# Altium PCB hazi_kiindulas.PcbDoc
Units mm, origin at the board's own origin, x right, y up, seen from the top; angles counter-clockwise.
Board outline 90.17 x 58.42 mm, 2 copper layers (Top Layer, Bottom Layer); 29 components, 59 nets, 238 pads, 54 vias.
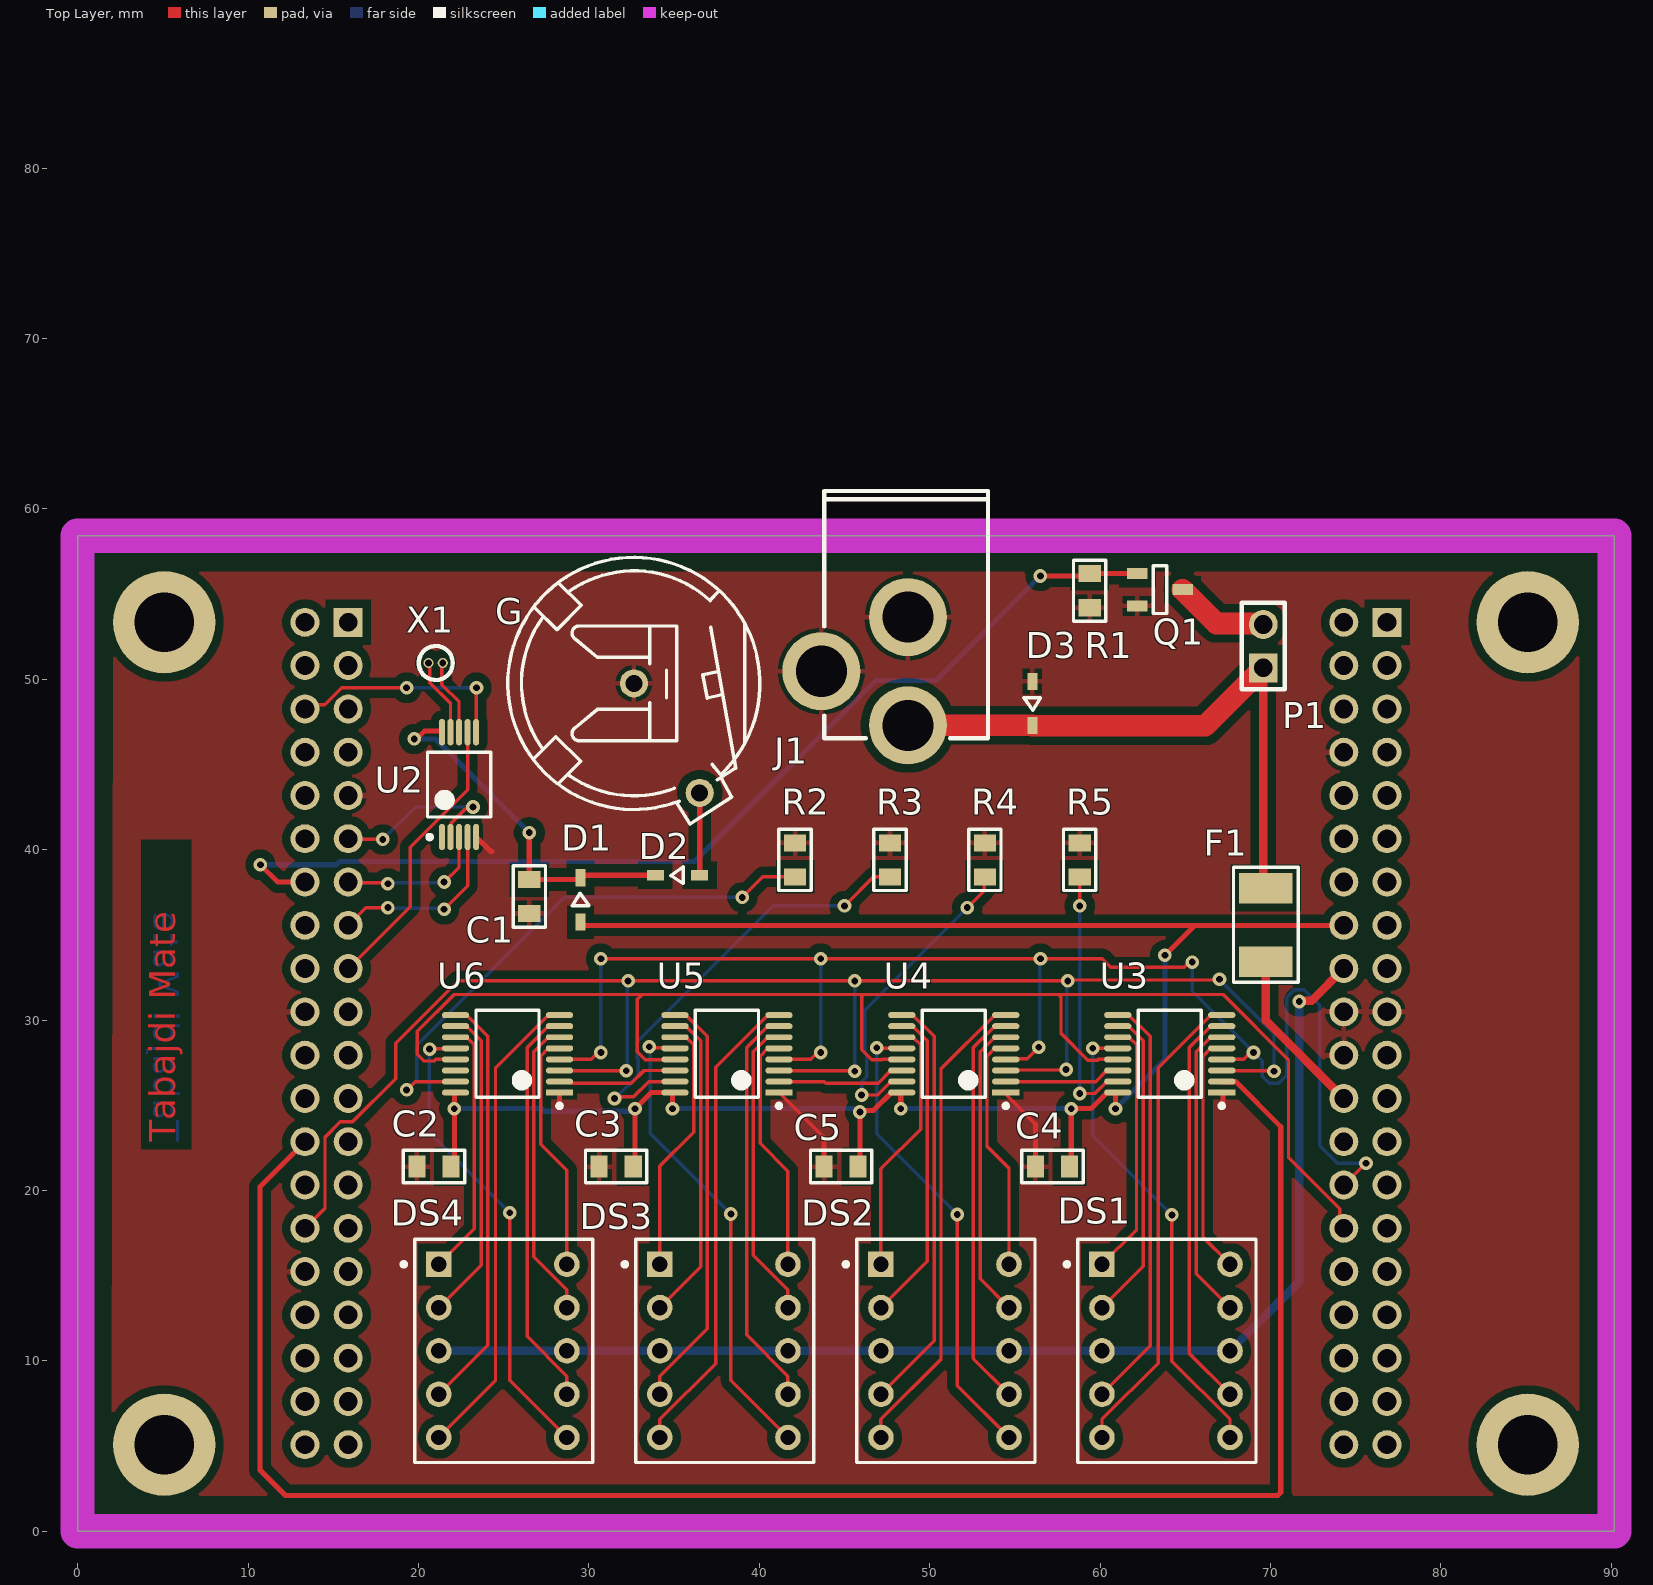
[diagram p0: Top Layer view]
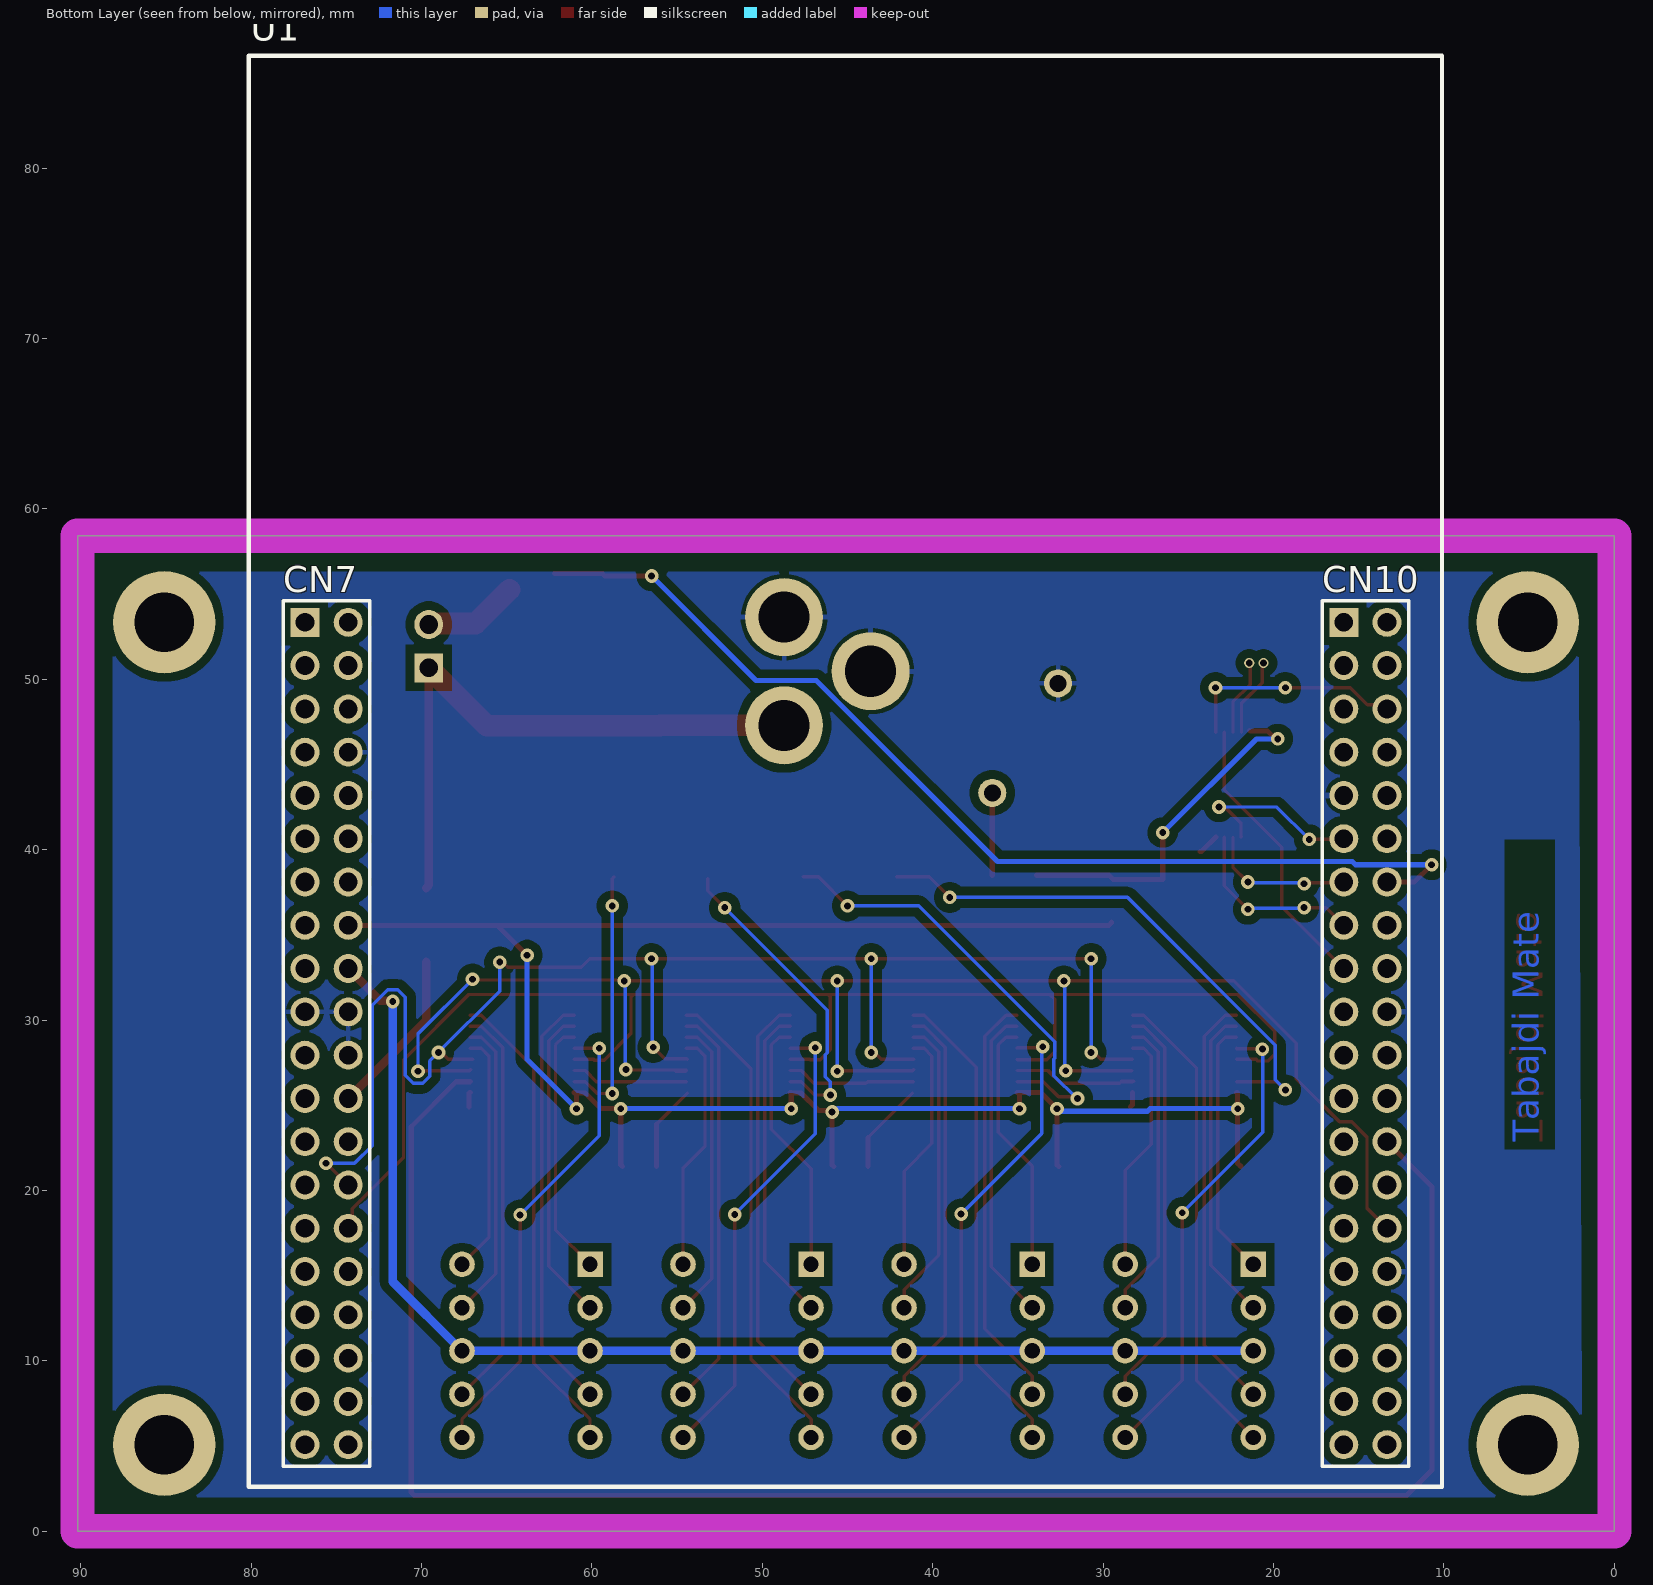
[diagram p1: Bottom Layer view, seen from below]

## Layer stack, top to bottom
Top Solder: solder mask 0.0102, Solder Resist, Dk 3.5
Top Layer: signal copper 0.0356
Dielectric 1: dielectric 0.32, FR-4, Dk 4.8
Bottom Layer: signal copper 0.0356
Bottom Solder: solder mask 0.0102, Solder Resist, Dk 3.5

## Board outline
0,0 90.17,0 90.17,58.42 0,58.42

## Design rules (kind name [scope] priority, off if disabled: settings)
BoardOutlineClearance [All] p1: gap=0.5 ignorepadtopadclearanceinfootprint=FALSE
Clearance [All] p1: gap=0.2 ignorepadtopadclearanceinfootprint=FALSE except(0.5: Arc-Fill Arc-Poly Arc-Region Track-Fill Track-Poly Track-Region SMDPad-Fill SMDPad-Poly SMDPad-Region THPad-Fill THPad-Poly THPad-Region Via-Fill Via-Poly Via-Region Fill-Fill Fill-Poly Fill-Region Poly-Poly Poly-Region Region-Region)
ComponentClearance [All] p1: gap=0.254 collisioncheckmode=3 verticalgap=0.2 showdistances=FALSE donotcheckwithout3dbody=TRUE
DiffPairsRouting [All] p1: maxlimit=0.25 minlimit=0.25 mostfreqgap=0.25 toplayer_minwidth=0.3 toplayer_maxwidth=0.38 toplayer_prefwidth=0.38 bottomlayer_minwidth=0.3 bottomlayer_maxwidth=0.38 bottomlayer_prefwidth=0.38 maxuncoupledlength=12.7
HoleSize [All] p1: absolutevalues=TRUE maxlimit=5 minlimit=0.4 maxpercent=80.000 minpercent=20.000
HoleToHoleClearance [All] p1: gap=0.25 allowstackedmicrovias=TRUE
MinimumAnnularRing [All] p1: minimumring=0.35
MinimumSolderMaskSliver [All] p1: minsoldermaskwidth=0.05
PlaneClearance [All] p1: clearance=0.5
PlaneConnect [All] p1: pad.planeconnectstyle=Relief pad.reliefexpansion=0.5 pad.reliefentries=4 pad.reliefconductorwidth=0.3 pad.reliefairgap=0.25 via.planeconnectstyle=Direct via.reliefexpansion=0.508 via.reliefentries=4 via.reliefconductorwidth=0.254 via.reliefairgap=0.254
PolygonConnect [All] p1: thpad.connectstyle=Relief thpad.reliefconductorwidth=0.3 thpad.reliefentries=4 thpad.polygonreliefangle="90 Angle" thpad.airgapwidth=0.25 smdpad.connectstyle=Relief smdpad.reliefconductorwidth=0.3 smdpad.reliefentries=4 smdpad.polygonreliefangle="90 Angle" smdpad.airgapwidth=0.25 via.connectstyle=Direct via.reliefconductorwidth=0.254 via.reliefentries=4 via.polygonreliefangle="90 Angle" via.airgapwidth=0.254
RoutingVias [All] p1: holewidth=0.4 width=0.8 viastyle="Through Hole" minholewidth=0.3 minwidth=0.7 maxholewidth=0.7 maxwidth=1.2
SilkToSilkClearance [All] p1: silktosilkclearance=0.1
SilkToSolderMaskClearance [IsPad] p1: minsilkscreentomaskgap=0.1 clearancetoexposedcopper=TRUE
SolderMaskExpansion [All] p1: expansion=0.1 istentingtop=FALSE
Width [All] p1: maxlimit=2.5 minlimit=0.2 preferedwidth=0.25
21 further rules are at their usual default settings.

## Classes and differential pairs
component class Display: C2 C3 C4 C5 DS3 DS4 R2 R3 R4 R5 U3 U4 U5 U6
component class Clock: C1 D1 D2 G U2 X1
component class Nucleo: D3 F1 J1 P1 Q1 R1 U1

## Components (designator, comment, footprint, x,y, rotation, side; value= is the part's Value field where it differs from the comment)
C1 "100nF" FP_0805_CAP_085 26.5,37.25 r90 top
C2 "100nF" FP_0805_CAP_085 20.904,21.4 r0 top
C3 "100nF" FP_0805_CAP_085 31.6,21.4 r0 top
C4 "100nF" FP_0805_CAP_085 57.2,21.4 r0 top
C5 "100nF" FP_0805_CAP_085 44.8,21.4 r0 top
D1 "SCHOTTKY" FP_SOD323-F 30.175,37.95 r180 top
D2 "SCHOTTKY" FP_SOD323-F 34.3,39.175 r270 top
D3 "12V" FP_SOD323-F 55.347,47.676 r0 top
DS1 "7SEG Red-CA" FP_7SEG 63.856,10.592 r0 top
DS2 "7SEG Red-CA" FP_7SEG 50.885,10.592 r0 top
DS3 "7SEG Red-CA" FP_7SEG 37.914,10.592 r0 top
DS4 "7SEG Red-CA" FP_7SEG 24.943,10.592 r0 top
F1 "Fuse (250mA)" FP_MULTIFUSE 69.723,37.744 r270 top
G "CH23-1220LF" CH23-1220LF 32.639,49.759 r90 top value=3V
J1 "2.xmm" FP_DC_TAP_ANYA 48.717,47.295 r0 top
P1 "Connector" FP_CONN2_TUSKE_254MM 69.571,50.673 r0 top
Q1 "NMOS" FP_SOT23-3 63.506,55.255 r180 top
R1 "100K" FP_0805_RES 59.385,55.194 r90 top
R2 "2K" FP_0805_RES 42.1,39.4 r270 top
R3 "2K" FP_0805_RES 47.667,39.4 r270 top
R4 "2K" FP_0805_RES 53.233,39.4 r270 top
R5 "2K" FP_0805_RES 58.8,39.4 r270 top
U1 "NUCLEO-F446RE" FP_NUCLEO-64_2x20 76.835,53.34 r180 bottom locked
U2 "RS5C348A-E2-F" TSSOP50P640X135-10M 22.377,43.815 r90 top
U3 "STP08CP05TTR" TSOP65P640X120-16M 64.084,28.016 r180 top
U4 "STP08CP05TTR" TSOP65P640X120-16M 51.41,28.016 r180 top
U5 "STP08CP05TTR" TSOP65P640X120-16M 38.1,28.016 r180 top
U6 "STP08CP05TTR" TSOP65P640X120-16M 25.222,28.016 r180 top
X1 "32.768KHz" "NXG 2X6 FOOTPRINT" 20.661,50.952 r0 top

## Footprints (in the part's own frame and the unit in brackets; to place one, negate y for a bottom-side part, rotate by r counter-clockwise, add the part's x,y. Pads: shape width x height; smd on the part's side, far side on the other; paste and mask are expansions set on the pad)
CH23-1220LF [mm]
  round 1.65 hole 1: NEG(0,0) POS(-6.425,-3.862)
  silkscreen extent -8.27,-7.39 7.4,7.4
FP_7SEG [mm] "LED, 7-Segment Display, 7.62 mm, RHD; 10 Leads; Row Space 5.08 mm; Pitch 2.54 mm"
  rect 1.5x1.5 hole 0.9: 1(-3.75,5.075)
  round 1.5 hole 0.9: 2(-3.75,2.535) 3(-3.75,-0.005) 4(-3.75,-2.545) 5(-3.75,-5.085) 6(3.765,-5.085) 7(3.765,-2.545) 8(3.765,-0.005) 9(3.765,2.535) 10(3.765,5.075)
  silkscreen extent -5.93,-6.56 5.29,6.54, body extent -5.16,-6.56 5.29,6.54, height 6.34
FP_0805_CAP_085 [mm] "0805 kapacitás YAGEO 0.85mm magas"
  rect 1x1.3 smd: 1(-1,0) 2(1,0)
  silkscreen extent -1.8,-0.95 1.8,0.95, body extent -1,-0.64 1.03,0.64, height 0.85
FP_0805_RES [mm] "0805 ellenállás"
  rect 1x1.3 smd: 1(-1,0) 2(1,0)
  silkscreen extent -1.8,-0.95 1.8,0.95, body extent -1,-0.62 1,0.63, height 0.62
FP_CONN2_TUSKE_254MM [mm] "2×1 tüskesor"
  rect 1.7x1.7 hole 1.1: 1(0,0)
  round 1.7 hole 1.1: 2(0,2.54)
  silkscreen extent -1.27,-1.27 1.27,3.81, body extent -1.27,-1.27 1.27,3.81, height 8.54
FP_DC_TAP_ANYA [mil] "DC HEBA25 TÁPFESZÜLTSÉG ALJZAT ZÁRT, NYÁKBA 90°"
  round 180 hole 118: 1(0,0) 2(0,250) 3(-200,125)
  silkscreen extent -193,-30 185,541, body extent -190,-31 183,539, height 440
FP_MULTIFUSE [mm] "POLYFUSE SMD 1812"
  rect 1.78x3.15 smd: 1(0,0) 2(4.318,0)
  silkscreen extent -1.22,-1.9 5.53,1.9, body extent -0.12,-1.71 4.57,1.71, height 1
FP_NUCLEO-64_2x20 [mm]
  round 1.7 hole 1.1: 0(0,-48.26) 0(2.54,-48.26) 0(60.96,-48.26) 0(63.5,-48.26) 2(2.54,0) 3(0,-2.54) 4(2.54,-2.54) 5(0,-5.08) 6(2.54,-5.08) 7(0,-7.62) 8(2.54,-7.62) 9(0,-10.16) 10(2.54,-10.16) 11(0,-12.7) 12(2.54,-12.7) 13(0,-15.24) 14(2.54,-15.24) 15(0,-17.78) 16(2.54,-17.78) 17(0,-20.32) 18(2.54,-20.32) 19(0,-22.86) 20(2.54,-22.86) 21(0,-25.4) 22(2.54,-25.4) 23(0,-27.94) 24(2.54,-27.94) 25(0,-30.48) 26(2.54,-30.48) 27(0,-33.02) 28(2.54,-33.02) 29(0,-35.56) 30(2.54,-35.56) 31(0,-38.1) 32(2.54,-38.1) 33(0,-40.64) 34(2.54,-40.64) 35(0,-43.18) 36(2.54,-43.18) 37(0,-45.72) 38(2.54,-45.72) 40(63.5,0) 41(60.96,-2.54) 42(63.5,-2.54) 43(60.96,-5.08) 44(63.5,-5.08) 45(60.96,-7.62) 46(63.5,-7.62) 47(60.96,-10.16) 48(63.5,-10.16) 49(60.96,-12.7) 50(63.5,-12.7) 51(60.96,-15.24) 52(63.5,-15.24) 53(60.96,-17.78) 54(63.5,-17.78) 55(60.96,-20.32) 56(63.5,-20.32) 57(60.96,-22.86) 58(63.5,-22.86) 59(60.96,-25.4) 60(63.5,-25.4) 61(60.96,-27.94) 62(63.5,-27.94) 63(60.96,-30.48) 64(63.5,-30.48) 65(60.96,-33.02) 66(63.5,-33.02) 67(60.96,-35.56) 68(63.5,-35.56) 69(60.96,-38.1) 70(63.5,-38.1) 71(60.96,-40.64) 72(63.5,-40.64) 73(60.96,-43.18) 74(63.5,-43.18) 75(60.96,-45.72) 76(63.5,-45.72)
  rect 1.7x1.7 hole 1.1: 1(0,0) 39(60.96,0)
  silkscreen extent -3.3,-50.72 66.72,33.25, body extent -3.3,-50.72 66.72,33.25, height 11
FP_SOD323-F [mm] "SOD323-F (SC-90)"
  rect 0.6x1 smd: 1(0.675,2.2) 2(0.675,-0.4)
  silkscreen extent 0.18,0.51 1.15,1.23, body extent 0.02,-0.46 1.37,2.24, height 0.79
FP_SOT23-3 [mm] "SOT23-3 tok"
  rect 1.2x0.65 smd: 1(1.327,-0.95) 2(1.327,0.95) 3(-1.327,0)
  silkscreen extent -0.4,-1.4 0.4,1.4, body extent -1.27,-1.46 1.27,1.46, height 0.97
"NXG 2X6 FOOTPRINT" [mm] "NXG 2x6 TH"
  round 0.6 hole 0.4: 1(-0.076,0) 2(0.762,0)
  silkscreen extent -0.65,-1 1.35,1, body extent -0.65,-1 1.35,1, height 7
TSOP65P640X120-16M [mm] "TSOP, 16-Leads, Body 5,00x4,40mm, Pitch 0,65mm, IPC Low Density"
  rect 1.6x0.35 smd: 1(-3.05,2.275)
  oval 1.6x0.35 smd: 2(-3.05,1.625) 3(-3.05,0.975) 4(-3.05,0.325) 5(-3.05,-0.325) 6(-3.05,-0.975) 7(-3.05,-1.625) 8(-3.05,-2.275) 9(3.05,-2.275) 10(3.05,-1.625) 11(3.05,-0.975) 12(3.05,-0.325) 13(3.05,0.325) 14(3.05,0.975) 15(3.05,1.625) 16(3.05,2.275)
  silkscreen extent -3.18,-2.55 1.85,3.17, body extent -2.25,-2.55 2.25,2.55, height 1.2
TSSOP50P640X135-10M [mm] "TSSOP, 10-Leads, Body 3,50x4,40mm, Pitch 0,50mm, IPC Low Density"
  oval 1.55x0.35 smd: 1(-3.075,1) 2(-3.075,0.5) 3(-3.075,0) 4(-3.075,-0.5) 5(-3.075,-1) 6(3.075,-1) 7(3.075,-0.5) 8(3.075,0) 9(3.075,0.5) 10(3.075,1)
  silkscreen extent -3.2,-1.85 1.9,1.85, body extent -3.2,-1.85 3.2,1.85, height 1.35

## Part data
C1 C2 C3 C4 C5: library part CAP, "Capacitor", Tolerance=10%, Voltage=50V, Reference=82-13-46, Supplier=Lomex
D1 D2: "Schottky diode", Reference=1972726, Supplier=Farnell
D3: library part ZENER, "Zener Diode", Reference=2069497, Supplier=Farnell, U_Z=12V
DS1 DS2 DS3 DS4: "7-Segment Display: CA, RH DP", Colour="High Efficiency Red (HER)", ComponentLink1Description="Manufacturer Link", ComponentLink1URL=http://www.agilent.com/, DatasheetVersion=19-Feb-2002, LatestRevisionDate=17-Dec-2003, LatestRevisionNote="Schematic revised, PCB Footprint replaced.", MinimumIntensity="360 ucd", Note="IF = 5 mA", PackageDescription="LED, 7-Segment Display, 7.62 mm, RHD; 10 Leads; Row Space 5.08 mm; Pitch 2.54 mm", PackageReference=A, PackageVersion=11-Feb-2002, Published=8-Jun-2000, Publisher="Altium Limited", Reference=35-03-94, Supplier=Lomex
  DS1: Name=FYS-3911BUHR-21
F1: library part Fuse, "Fuse", Reference=2929331, Supplier=Farnell
G: "BATTERY HOLDER, DIP, 12MM; Accessory Type: Coin Cell Battery Holder; For Use With: 1220 Coin Cell Batteries; Battery ...", Package=None, Availability=Unavailable, MF=Multicomp, MP=CH23-1220LF, Price=None, Reference=2064721, SnapEDA_Link=https://www.snapeda.com/parts/CH23-1220LF/Multicomp/view-part/575172/?ref=snap, Supplier=Farnell
J1: library part DC_TAP_ANYA, "2.xmm DC HEBA25 TÁPFESZÜLTSÉG ALJZAT ZÁRT, NYÁKBA 90°", Name="TÁP DC ANYA 5.5/2.1/9.5mm DCS-5521-5", Reference=43-07-67, Supplier=Lomex
P1: library part Connector_2pin, "2pin connector"
Q1: "NXP - BSP030,115 - MOSFET, N CH, 30V, 10A, SOT223", Reference=2061404, Supplier=Farnell
R1 R2 R3 R4 R5: library part RES, "Resistor", Power=0.125W, Tolerance=5%, Supplier=Lomex
  R1: Reference=81-35-12
  R2 R3 R4 R5: Reference=81-11-90
U2: "Real-time clock", Name=RS5C348A-E2-F, Reference=RIC011, Supplier=ChipCAD
U3 U4 U5 U6: "Low voltage, low current power 8-bit shift register", Name=STP08CP05TTR, Supplier="Tanszéki forrás"
X1: library part Crystal, "Quarz Crystal", Reference=40-00-51, Supplier=Lomex
U1: Name="Nucleo F446RE", Reference=NUCLEO, Supplier=Tanszék

## Free pads (board coordinates)
  round 6 hole 3.5: ""(5.08,5.08) ""(5.08,53.34) ""(85.09,5.08) ""(85.09,53.34)

## Via types
v1: diameter 0.8, hole 0.4, Top Layer to Bottom Layer, 54 vias

## Nets (pads, with @x,y where several pads share a name; then routed paths per layer and width w, separated by ;. In a path a pad name is that pad's centre, name@x,y a point inside that pad or via, vN(x,y) a via of type N, cw(c..) or ccw(c..) an arc to the next point about the centre after c; other vN are vias at no path point)
+3V3: C2.2 C3.2 C4.2 C5.2 D1.1 U1.16 U3.16 U4.16 U5.16 U6.16 | length 115.8
  Top Layer w0.3: C2.2 22.1,21.596 v1(22.1,24.8) 22.1,25.718 22.123,25.741 U6.16 ; D1.1 29.5,35.71 29.65,35.56 65.56,35.56 ; C3.2 32.7,21.5 v1(32.7,24.8) 33.641,25.741 U5.16@34.923,25.741 ; v1(34.9,24.8) 34.9,25.718 U5.16@34.923,25.741 ; U5.16 U5.16@34.923,25.741 ; C5.2 45.9,21.5 45.9,24.8 45.999,24.701 46.694,24.701 47.718,25.725 48.343,25.725 U4.16 ; v1(48.3,24.8) 48.3,25.718 U4.16@48.323,25.741 ; C4.2 58.3,21.5 v1(58.3,24.8) 59.468,24.8 60.393,25.725 61.018,25.725 U3.16 ; v1(60.9,24.8) 60.9,25.718 U3.16@60.923,25.741 ; v1(63.8,33.8) 65.56,35.56 ; U1.16 65.56,35.56
  Bottom Layer w0.3: v1(22.1,24.8) 27.25,24.8 27.4,24.65 32.415,24.65 32.565,24.8 v1(32.7,24.8) ; v1(34.9,24.8) 45.57,24.8 45.765,24.605 v1(45.9,24.605) ; v1(48.3,24.8) v1(58.3,24.8) ; v1(60.9,24.8) 63.8,27.7 v1(63.8,33.8)
+5: DS1.3 DS1.8 DS2.3 DS2.8 DS3.3 DS3.8 DS4.3 DS4.8 U1.18 | length 72
  Top Layer w0.5: v1(71.679,31.09) 71.736,31.147 72.422,31.147 U1.18
  Bottom Layer w0.5: DS4.3 DS4.8 DS3.3 DS3.8 DS2.3 DS2.8 DS1.3 DS1.8 71.679,14.645 v1(71.679,31.09)
D1_SEG0: DS1.10 U3.5 | length 14.2
  Top Layer w0.2: U3.5 66.487,28.341 66.034,27.888 66.034,17.253 DS1.10
D1_SEG1: DS1.9 U3.6 | length 17.7
  Top Layer w0.2: U3.6 66.487,28.991 65.634,28.138 65.634,15.113 DS1.9
D1_SEG2: DS1.7 U3.7 | length 23.7
  Top Layer w0.2: U3.7 66.487,29.641 65.234,28.388 65.234,10.433 DS1.7
D1_SEG3: DS1.5 U3.8 | length 28.1
  Top Layer w0.2: DS1.5 60.106,6.562 63.402,9.858 63.402,27.206 66.487,30.291 U3.8
D1_SEG4: DS1.4 U3.9 | length 24.6
  Top Layer w0.2: DS1.4 62.934,10.875 62.934,29.038 61.681,30.291 U3.9
D1_SEG5: DS1.2 U3.10 | length 18.5
  Top Layer w0.2: DS1.2 62.534,15.555 62.534,28.788 61.681,29.641 U3.10
D1_SEG6: DS1.1 U3.11 | length 15
  Top Layer w0.2: DS1.1 62.134,17.695 62.134,28.538 61.681,28.991 U3.11
D1_SEG7: DS1.6 U3.12 | length 27.7
  Top Layer w0.2: v1(59.563,28.346) 59.566,28.344 61.032,28.344 U3.12 ; v1(64.211,18.567) 64.211,9.971 67.621,6.562 DS1.6
  Bottom Layer w0.2: v1(59.563,28.346) 59.563,23.216 v1(64.211,18.567)
D2_SEG0: DS2.10 U4.5 | length 14
  Top Layer w0.2: U4.5 53.813,28.341 53.36,27.888 53.36,22.598 54.65,21.308 DS2.10
D2_SEG1: DS2.9 U4.6 | length 17.6
  Top Layer w0.2: U4.6 53.813,28.991 52.96,28.138 52.96,14.817 DS2.9
D2_SEG2: DS2.7 U4.7 | length 23.6
  Top Layer w0.2: U4.7 53.813,29.641 52.56,28.388 52.56,10.137 DS2.7
D2_SEG3: DS2.5 U4.8 | length 28.2
  Top Layer w0.2: DS2.5 47.135,6.562 50.66,10.087 50.66,27.138 53.813,30.291 U4.8
D2_SEG4: DS2.4 U4.9 | length 24.7
  Top Layer w0.2: DS2.4 50.26,11.172 50.26,29.038 49.006,30.291 U4.9
D2_SEG5: DS2.2 U4.10 | length 18.6
  Top Layer w0.2: DS2.2 49.86,15.852 49.86,28.788 49.006,29.641 U4.10
D2_SEG6: DS2.1 U4.11 | length 15.1
  Top Layer w0.2: DS2.1 47.135,21.265 49.46,23.59 49.46,28.538 49.006,28.991 U4.11
D2_SEG7: DS2.6 U4.12 | length 27.6
  Top Layer w0.2: v1(46.888,28.372) 46.904,28.357 48.344,28.357 U4.12 ; v1(51.613,18.593) 51.613,8.544 DS2.6
  Bottom Layer w0.2: v1(46.888,28.372) 46.888,23.317 v1(51.613,18.593)
D3_SEG0: DS3.10 U5.5 | length 14.2
  Top Layer w0.2: U5.5 40.503,28.341 40.05,27.888 40.05,22.768 41.679,21.139 DS3.10
D3_SEG1: DS3.9 U5.6 | length 17.7
  Top Layer w0.2: U5.6 40.503,28.991 39.65,28.138 39.65,16.211 41.679,14.182 DS3.9
D3_SEG2: DS3.7 U5.7 | length 23.8
  Top Layer w0.2: U5.7 40.503,29.641 39.25,28.388 39.25,11.531 41.679,9.102 DS3.7
D3_SEG3: DS3.5 U5.8 | length 28.1
  Top Layer w0.2: DS3.5 34.164,6.562 37.439,9.837 37.439,27.227 40.503,30.291 U5.8
D3_SEG4: DS3.4 U5.9 | length 24.6
  Top Layer w0.2: DS3.4 34.164,9.102 36.95,11.888 36.95,29.038 35.697,30.291 U5.9
D3_SEG5: DS3.2 U5.10 | length 18.5
  Top Layer w0.2: DS3.2 36.55,15.513 36.55,28.788 35.697,29.641 U5.10
D3_SEG6: DS3.1 U5.11 | length 15
  Top Layer w0.2: DS3.1 34.164,21.434 36.15,23.421 36.15,28.538 35.697,28.991 U5.11
D3_SEG7: DS3.6 U5.12 | length 27.8
  Top Layer w0.2: v1(33.543,28.433) 33.606,28.37 35.021,28.37 U5.12 ; v1(38.329,18.618) 38.329,8.857 DS3.6
  Bottom Layer w0.2: v1(33.543,28.433) 33.604,28.372 33.604,23.343 v1(38.329,18.618)
D4_SEG0: DS4.10 U6.5 | length 14.1
  Top Layer w0.2: U6.5 27.625,28.341 27.172,27.888 27.172,22.721 28.708,21.185 DS4.10
D4_SEG1: DS4.9 U6.6 | length 17.7
  Top Layer w0.2: U6.6 27.625,28.991 26.772,28.138 26.772,16.117 28.708,14.182 DS4.9
D4_SEG2: DS4.7 U6.7 | length 23.7
  Top Layer w0.2: U6.7 27.625,29.641 26.372,28.388 26.372,11.437 28.708,9.102 DS4.7
D4_SEG3: DS4.5 U6.8 | length 28.1
  Top Layer w0.2: DS4.5 24.514,8.828 24.514,27.18 27.625,30.291 U6.8
D4_SEG4: DS4.4 U6.9 | length 24.6
  Top Layer w0.2: DS4.4 24.072,10.926 24.072,29.038 22.819,30.291 U6.9
D4_SEG5: DS4.2 U6.10 | length 18.5
  Top Layer w0.2: DS4.2 23.672,15.606 23.672,28.788 22.819,29.641 U6.10
D4_SEG6: DS4.1 U6.11 | length 15
  Top Layer w0.2: DS4.1 23.272,17.746 23.272,28.538 22.819,28.991 U6.11
D4_SEG7: DS4.6 U6.12 | length 27.7
  Top Layer w0.2: v1(20.651,28.296) 20.674,28.318 22.149,28.318 U6.12 ; v1(25.349,18.694) 25.349,8.865 DS4.6
  Bottom Layer w0.2: v1(20.651,28.296) 20.625,28.269 20.625,23.419 v1(25.349,18.694)
GND: C1.1 C2.1 C3.1 C4.1 C5.1 D3.1 G.NEG J1.2 J1.3 Q1.2 R1.1 R2.1 R3.1 R4.1 R5.1 U1.8 U1.19 U1.20 U1.22 U1.47 U1.58 U1.70 U2.5 U3.1 U4.1 U5.1 U6.1 | length 13.5
  Top Layer w0.2: U5.1@41.2,25.7 43.8,23.1 ; U4.1@54.4,25.7 56.2,23.9
  Top Layer w0.3: U2.5 24.217,39.9 24.3,39.9 ; U6.1 28.272,25.028 28.4,24.9 ; C5.1 43.8,23.1 ; C4.1 56.2,23.9 ; U3.1 67.175,25.741 67.2,25.716 67.2,24.9
NetC1_2: C1.2 D1.2 D2.2 U2.10 | length 21.1
  Top Layer w0.3: v1(19.75,46.5) 19.885,46.5 20.34,46.954 21.354,46.954 U2.10@21.4,47 ; v1(26.5,41) C1.2 29.4,38.25 D1.2 29.65,38.5 D2.2
  Bottom Layer w0.3: v1(19.75,46.5) 21,46.5 v1(26.5,41)
NetD2_1: D2.1 G.POS | length 4.8
  Top Layer w0.3: D2.1 36.501,38.501 G.POS
NetD3_2: D3.2 F1.1 J1.1 P1.1 | length 35.3
  Top Layer w0.5: P1.1 69.571,37.897 F1.1
  Top Layer w1.27: J1.1 56.003,47.295 D3.2 66.173,47.276 P1.1
NetF1_2: F1.2 U1.24 | length 9.9
  Top Layer w0.5: F1.2 69.723,29.972 U1.24
NetP1_2: P1.2 Q1.3 | length 5.6
  Top Layer w1.27: Q1.3 66.816,53.273 69.511,53.273 P1.2
NetQ1_1: Q1.1 R1.2 U1.52 | length 61.6
  Top Layer w0.3: v1(10.719,39.116) 11.735,38.1 U1.52 ; v1(56.49,56.058) 59.249,56.058 R1.2 59.396,56.205 Q1.1
  Bottom Layer w0.3: v1(10.719,39.116) 15.194,39.116 15.378,39.3 36.195,39.3 46.826,49.931 50.363,49.931 v1(56.49,56.058)
NetR2_2: R2.2 U6.15 | length 32.2
  Top Layer w0.2: v1(19.3,25.9) 19.308,25.9 19.799,26.391 U6.15 ; v1(39,37.2) 40.2,38.4 R2.2
  Bottom Layer w0.2: v1(19.3,25.9) 19.888,26.488 19.888,28.522 28.566,37.2 v1(39,37.2)
NetR3_2: R3.2 U5.15 | length 26.7
  Top Layer w0.2: v1(31.5,25.4) 31.6,25.5 32.613,25.5 33.505,26.391 U5.15 ; v1(45,36.7) 46.7,38.4 R3.2@47.6,38.4
  Bottom Layer w0.2: v1(31.5,25.4) 31.556,25.4 32.889,26.733 32.889,27.705 32.843,27.751 32.843,28.723 40.82,36.7 v1(45,36.7)
NetR4_2: R4.2 U4.15 | length 18.5
  Top Layer w0.2: v1(46,25.6) 46.922,25.6 47.713,26.391 U4.15 ; v1(52.2,36.6) 53.2,37.6 R4.2@53.2,38.3
  Bottom Layer w0.2: v1(46,25.6) 46,26.376 46.3,26.676 46.3,27.97 46.188,28.082 46.188,30.588 v1(52.2,36.6)
NetR5_2: R5.2 U3.15 | length 15.3
  Top Layer w0.2: R5.2@58.7,38.4 58.8,38.3 v1(58.8,36.7) ; v1(58.8,25.691) 59.687,25.691 60.387,26.391 U3.15
  Bottom Layer w0.2: v1(58.8,25.691) v1(58.8,36.7)
NetU1_44: U1.44 U2.6 | length 13.2
  Top Layer w0.2: U1.44 13.571,48.496 14.485,48.496 15.489,49.5 v1(19.3,49.5) ; U2.6 23.389,46.901 23.389,49.489 v1(23.4,49.5)
  Bottom Layer w0.2: v1(19.3,49.5) v1(23.4,49.5)
NetU1_49: U1.49 U2.2 | length 10.6
  Top Layer w0.2: U1.49 15.895,40.62 17.88,40.62 v1(17.9,40.6) ; U2.2 21.906,40.769 21.906,41.54 22.751,42.385 23.085,42.385 v1(23.2,42.5)
  Bottom Layer w0.2: v1(17.9,40.6) 19.8,42.5 v1(23.2,42.5)
NetU1_51: U1.51 U2.3 | length 8.7
  Top Layer w0.2: U1.51 15.925,38.05 18.15,38.05 v1(18.2,38) ; v1(21.5,38.1) 22.377,38.977 U2.3
  Bottom Layer w0.2: v1(18.2,38) 18.25,38.05 21.45,38.05 v1(21.5,38.1)
NetU1_53: U1.53 U2.4 | length 10.9
  Top Layer w0.2: U1.53 16.915,36.6 v1(18.2,36.6) ; v1(21.5,36.5) 22.877,37.877 U2.4
  Bottom Layer w0.2: v1(18.2,36.6) 18.25,36.55 21.45,36.55 v1(21.5,36.5)
NetU1_55: U1.55 U2.7 | length 16.8
  Top Layer w0.2: U1.55 19.505,36.65 19.505,40.14 22.877,43.512 U2.7
NetU1_64: U1.64 U3.2 | length 107
  Top Layer w0.3: U1.64 10.7,20.225 10.7,3.6 12.2,2.1 70.424,2.1 70.6,2.276 70.6,23.745 67.964,26.382 67.144,26.382 U3.2
NetU2_8: U2.8 X1.2 | length 4.5
  Top Layer w0.2: X1.2@21.361,50.952 21.361,49.689 22.377,48.673 U2.8
NetU2_9: U2.9 X1.1 | length 4.6
  Top Layer w0.2: X1.1@20.661,50.952 20.661,49.803 21.877,48.587 U2.9
NetU3_14: U3.14 U4.2 | length 6.8
  Top Layer w0.2: U4.2 59.737,26.391 60.387,27.041 U3.14
NetU4_14: U4.14 U5.2 | length 7.6
  Top Layer w0.2: U5.2 43.822,26.391 43.913,26.3 46.972,26.3 47.713,27.041 U4.14
NetU5_14: U5.14 U6.2 | length 7.8
  Top Layer w0.2: U6.2@28.2,26.4 28.929,26.4 29.029,26.3 32.49,26.3 33.231,27.041 U5.14 ; U6.2 U6.2@28.919,26.391
Segment_CLK: U1.68 U3.3 U4.3 U5.3 U6.3 | length 101.7
  Top Layer w0.2: U1.68@13.3,17.8 13.355,17.8 14.51,18.955 14.51,23.122 15.411,24.023 16.124,24.023 18.654,26.553 18.654,28.636 22.319,32.3 v1(32.3,32.3) v1(45.6,32.3) v1(58.1,32.3) 58.15,32.35 66.95,32.35 v1(67,32.4) ; U6.3@28.321,27.021 32.187,27.021 v1(32.189,27.023) ; U5.3@41.1,27.1 41.179,27.021 45.579,27.021 v1(45.6,27) ; U4.3 54.488,27.07 57.97,27.07 v1(58,27.1) ; U4.3@54.5,27 U4.3@55.084,27 ; U3.3@67.1,27.1 67.179,27.021 70.179,27.021 v1(70.2,27)
  Bottom Layer w0.2: v1(32.189,27.023) 32.25,27.084 32.25,32.25 v1(32.3,32.3) ; v1(45.6,27) v1(45.6,32.3) ; v1(58,27.1) 58.05,27.15 58.05,32.25 v1(58.1,32.3) ; v1(67,32.4) 70.2,29.2 v1(70.2,27)
Segment_LE: U1.28 U3.4 U4.4 U5.4 U6.4 | length 91.6
  Top Layer w0.2: U6.4 30.129,27.691 30.538,28.1 v1(30.7,28.1) ; v1(30.7,33.6) v1(43.6,33.6) v1(56.5,33.6) 60.126,33.6 60.626,33.1 64.938,33.1 65.238,33.4 v1(65.4,33.4) ; U5.4@41.1,27.7 41.109,27.691 U5.4 43.029,27.691 43.438,28.1 v1(43.6,28.1) ; U4.4@54.4,27.7 54.42,27.72 55.72,27.72 v1(56.4,28.4) ; U3.4@67,27.7 67.009,27.691 U3.4 68.429,27.691 68.838,28.1 v1(69,28.1) ; U1.28@74.2,20.4 74.387,20.4 75.587,21.6 v1(75.6,21.6)
  Bottom Layer w0.2: v1(30.7,28.1) v1(30.7,33.6) ; v1(43.6,28.1) v1(43.6,33.6) ; v1(56.4,28.4) 56.45,28.45 56.45,33.55 v1(56.5,33.6) ; v1(65.4,33.4) 65.4,31.7 v1(69,28.1) 69.5,27.6 69.5,26.71 69.91,26.3 70.49,26.3 70.939,26.749 70.939,31.34 71.389,31.79 71.969,31.79 72.894,30.865 72.894,22.635 73.929,21.6 v1(75.6,21.6)
Segment_O\E\: U1.30 U3.13 U4.13 U5.13 U6.13 | length 86.7
  Top Layer w0.2: U6.13 21.01,27.691 20.915,27.596 20.335,27.596 19.925,28.006 19.925,29.341 22.084,31.5 33.117,31.5 ; U5.13 35.031,27.672 33.314,27.672 32.843,28.143 32.843,31.226 33.117,31.5 ; U4.13 47.198,27.691 47.178,27.672 46.598,27.672 46,28.27 46,31.383 46.117,31.5 ; U3.13 59.898,27.691 59.853,27.646 59.273,27.646 57.7,29.219 57.7,31.383 57.583,31.5 ; U1.30 74.059,18.016 74.059,18.93 71.05,21.939 71.05,27.672 67.222,31.5 57.583,31.5 ; 33.117,31.5 46.117,31.5 ; 46.117,31.5 57.583,31.5
pads on no net: U1.0 U1.1 U1.2 U1.3 U1.4 U1.5 U1.6 U1.7 U1.9 U1.10 U1.11 U1.12 U1.13 U1.14 U1.15 U1.17 U1.21 U1.23 U1.25 U1.26 U1.27 U1.29 U1.31 U1.32 U1.33 U1.34 U1.35 U1.36 U1.37 U1.38 U1.39 U1.40 U1.41 U1.42 U1.43 U1.45 U1.46 U1.48 U1.50 U1.54 U1.56 U1.57 U1.59 U1.60 U1.61 U1.62 U1.63 U1.65 U1.66 U1.67 U1.69 U1.71 U1.72 U1.73 U1.74 U1.75 U1.76 U2.1 U6.14

## Polygon pours and split planes (outlines as drawn)
GND on Top Layer "Top_GND" (solid, remove dead copper, pour order 0): 2.1,56.5 2.3,56.3 88.1,56.3 88.1,2 88,1.9 87.8,2.1 2,2.1
GND on Bottom Layer "Top_GND" (solid, remove dead copper, pour order 1): 2.1,56.3 87.9,56.3 88,56.4 88.1,56.3 88.1,2 2,2 1.9,2.1

## Keep-outs
Keep-Out Layer:
  the board outline again, w2

## Other copper
Top Layer:
  text "Tabajdi Mate" at 5.715,22.86 h1.52 r90
Bottom Layer:
  text "Tabajdi Mate" at 4.445,22.86 h1.52 r270

## Silkscreen, mask and mechanical layers (free items; w line width, h text height)
Mechanical 1:
  the board outline again, w0.254

## Text inside footprints (layer, text, board x,y; h text height)
U1: Bottom Overlay "CN10" at 17.145,55.118 h1.52; Bottom Overlay "CN7" at 78.105,55.118 h1.52